# EAGLE board 5V-DC-Sch (EAGLE 9.0.0)
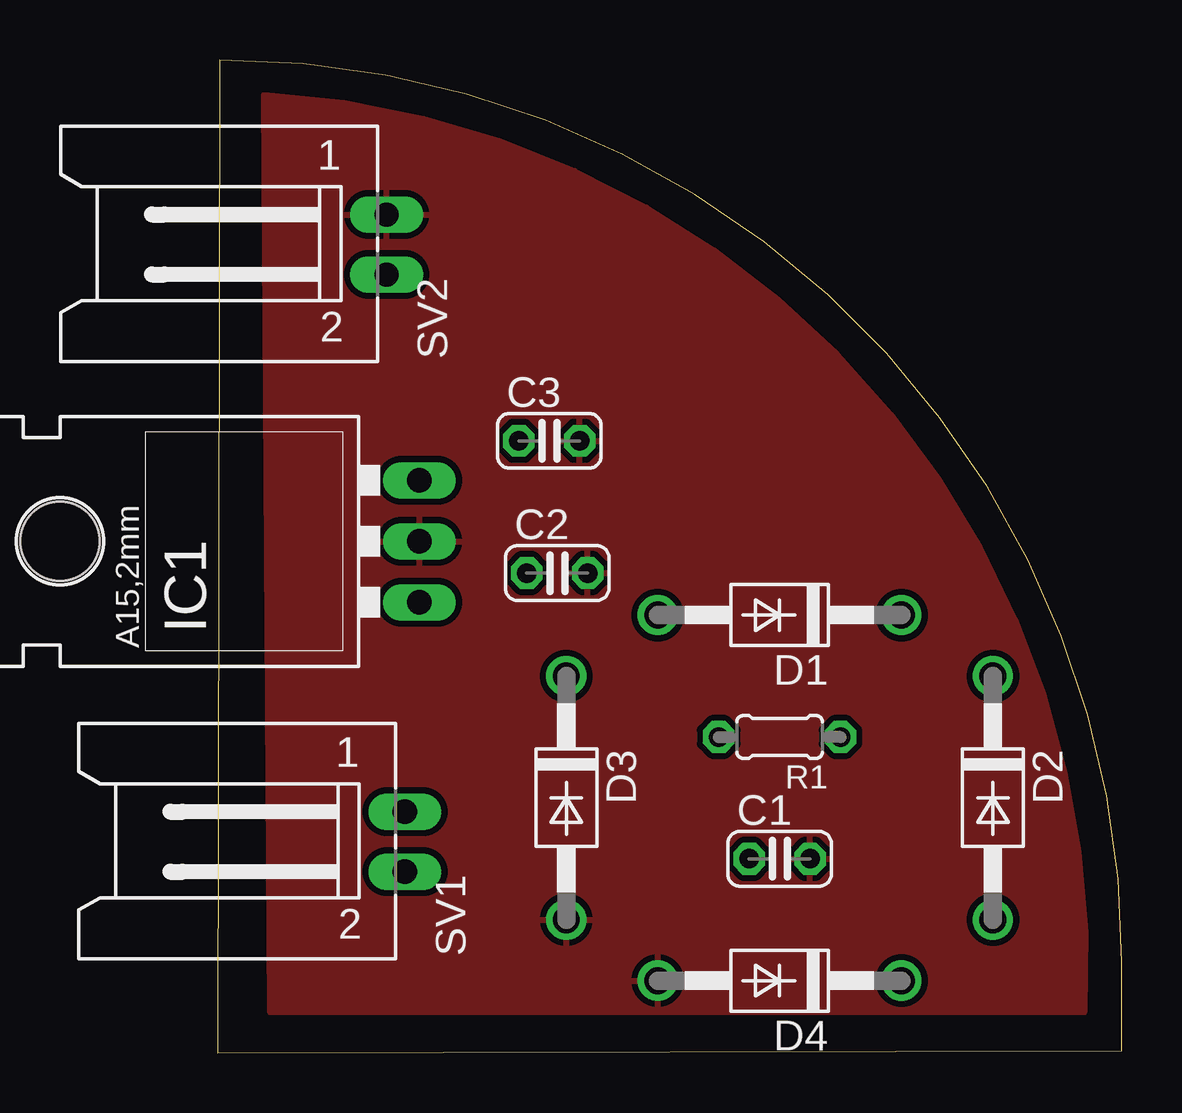
[diagram p0: board, top side]
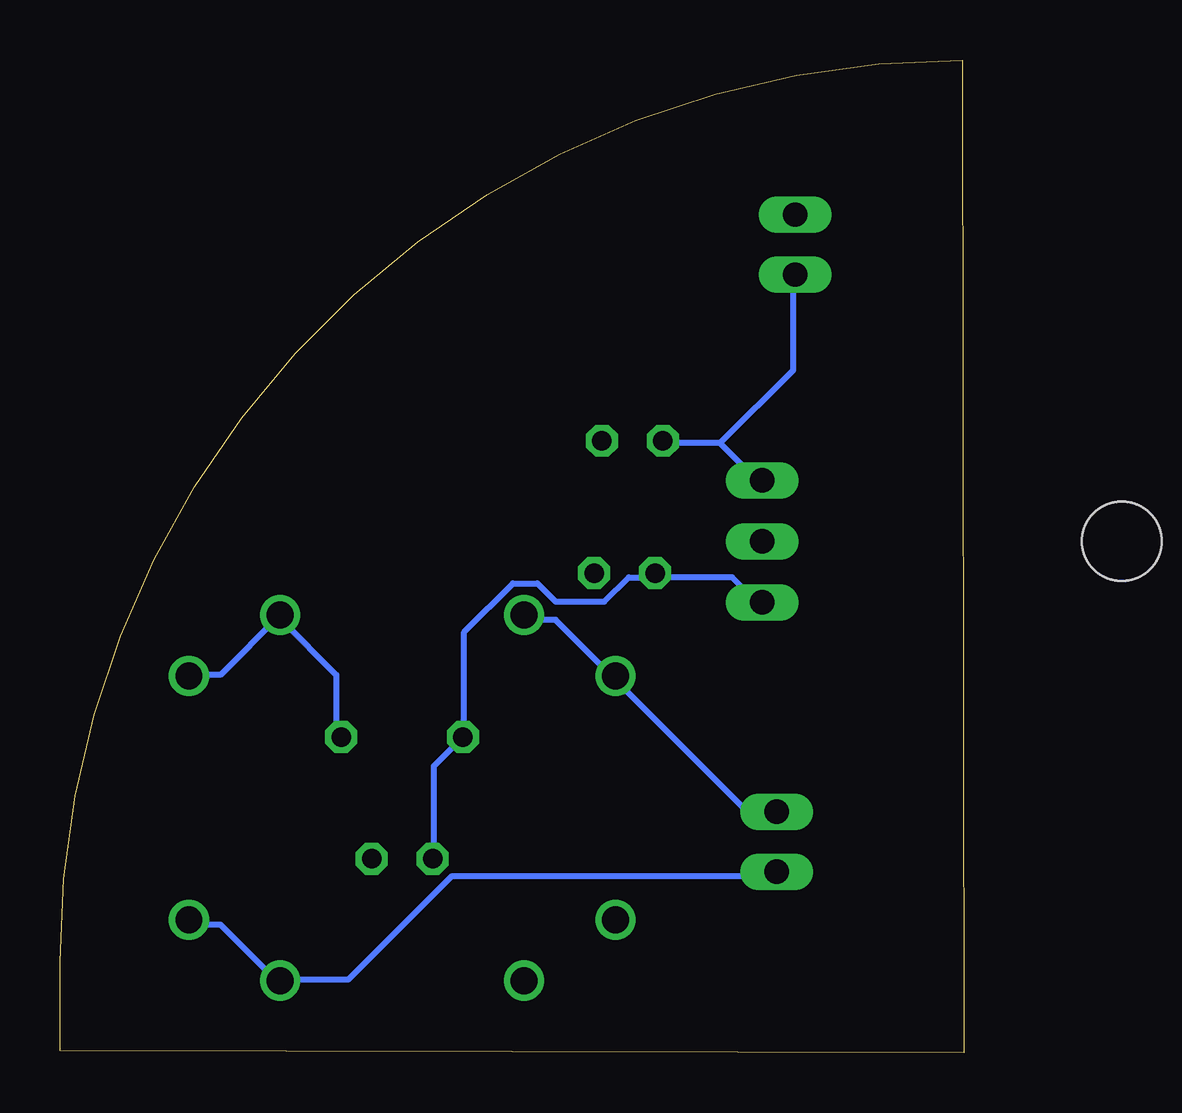
[diagram p1: board, bottom side, seen from below]

Size 37.68 x 41.38 mm. Coordinates in mm from the lower left corner, seen from the top.
Outline: 0,0 37.67,0.08 37.68,3.78 arc90 0.08,41.38 0,0
Copper layers (1*16): Top 0.035mm / dielectric 1.5mm / Bottom 0.035mm
Design rules "default *": minimum track width 10mil, minimum drill 0.35mm, track to track 10mil, track to pad 10mil, pad to pad 10mil, via to via 10mil, smd to smd 6mil, copper to edge 20mil, drill to drill 6mil, minimum pad ring 10mil, minimum via ring 8mil, stop-mask expansion 4mil, vias tented up to drill 0mil, thermal gap 10mil

## Footprints (pad centres in the part's own frame; a part is rotated, then mirrored left to right if it is on the bottom)
C025-024X044 = drill 0.813 octagon: 1 -1.27,0; 2 1.27,0
DO41-10 = drill 1.118: A 5.08,0; C -5.08,0
78XXL = drill 1.016 long: GND 0,-3.81; IN -2.54,-3.81; OUT 2.54,-3.81 | hole 3.302: 0,11.176
0204/5 = drill 0.813 octagon: 1 -2.54,0; 2 2.54,0
L02P = drill 1.016 long: 1 1.25,-6.25; 2 -1.25,-6.25

## Placement (x,y rotation side)
C1  [C025-024X044]  23.42,8.08 0 top
C2  [C025-024X044]  14.15,19.99 0 top
C3  [C025-024X044]  13.82,25.5 0 top
D1  1N4004  [DO41-10]  23.42,18.24 180 top
D2  1N4004  [DO41-10]  32.31,10.62 270 top
D3  1N4004  [DO41-10]  14.53,10.62 270 top
D4  1N4004  [DO41-10]  23.42,3 180 top
IC1  [78XXL]  4.6,21.31 90 top
R1  [0204/5]  23.42,13.16 180 top
SV1  [L02P]  1.55,8.79 90 top
SV2  [L02P]  0.79,33.68 90 top

## Library data of the parts
C1-C3 = rcl; SPICEPREFIX: C
D1-D4 = diode
IC1 = v-reg
R1 = rcl; SPICEPREFIX: R
SV1 SV2 = con-amp-mt; OC_FARNELL: unknown; OC_NEWARK: unknown

## Nets
GND: C1.2 C2.2 C3.2 D3.A D4.A IC1.GND SV2.1
N$1: D1.A D3.C SV1.1
N$2: D1.C D2.C R1.1
N$3: D2.A D4.C SV1.2
N$6: C1.1 C2.1 IC1.IN R1.2
N$8: C3.1 IC1.OUT SV2.2

## Tracks (layer width: path | path; a pad name or v marks a point on that pad's centre or on a via)
GND
  pour Top: 1.93,39.93 arc-90 36.12,1.68 2.18,1.68
N$1
  Bottom 0.254: SV1.1 7.87,10.16 9.14,10.16 14.48,15.49 D3.C 14.73,15.75 17.02,18.03 18.29,18.03 D1.A
N$2
  Bottom 0.254: R1.1 26.16,13.21 26.16,15.75 28.45,18.03 D1.C 30.99,15.75 32.26,15.75 D2.C
N$3
  Bottom 0.254: SV1.2 7.87,7.37 21.34,7.37 25.65,3.05 28.45,3.05 D4.C 28.7,3.05 30.99,5.33 32.26,5.33 D2.A
N$6
  Bottom 0.254: IC1.IN 8.64,18.8 9.65,19.81 12.7,19.81 C2.1 12.95,19.81 13.97,19.81 14.99,18.8 17.02,18.8 17.78,19.56 18.8,19.56 20.83,17.53 20.83,13.21 R1.2 22.1,11.94 22.1,8.13 C1.1
N$8
  Bottom 0.254: 10.16,25.4 12.45,25.4 C3.1 | 10.16,25.4 8.64,23.88 IC1.OUT | 10.16,25.4 7.11,28.45 7.11,32.26 SV2.2